# EAGLE board rs-485-multiplier-v2 (EAGLE 6.4)
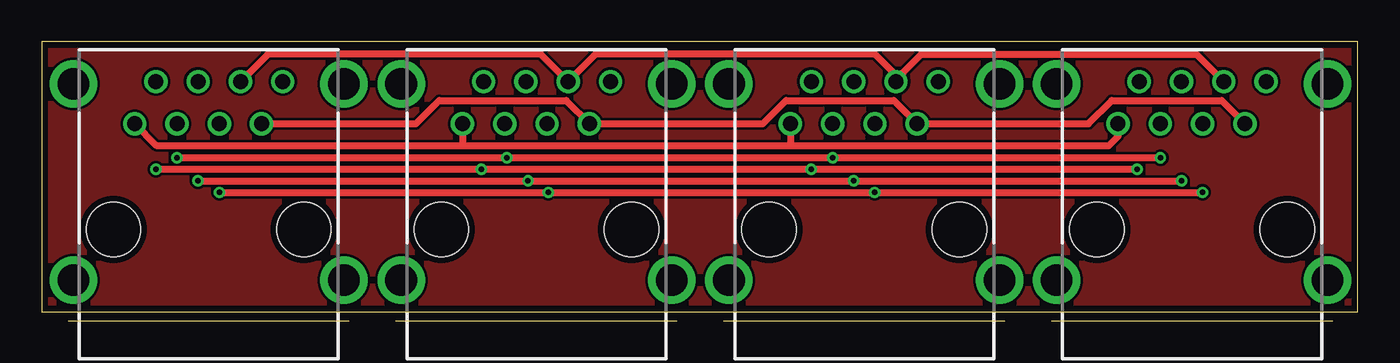
[diagram p0: board, top side]
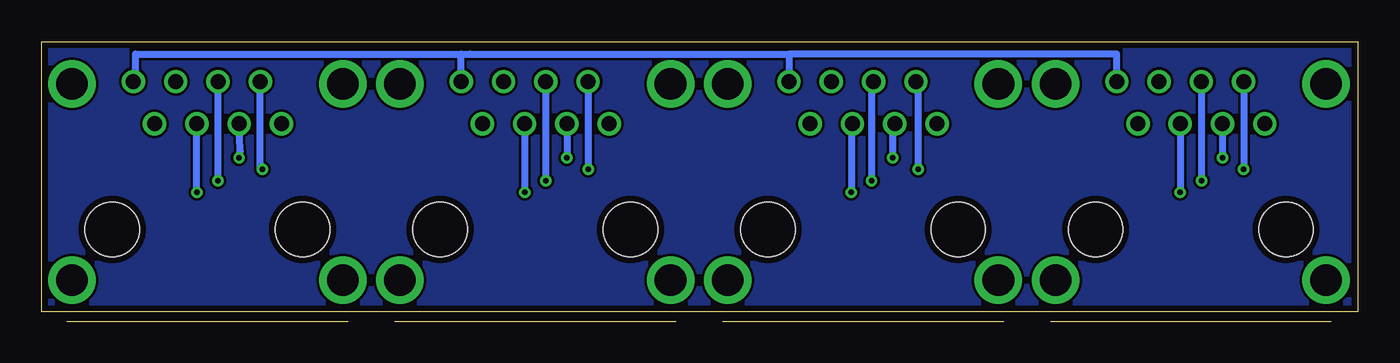
[diagram p1: board, bottom side, seen from below]

Size 79.05 x 16.25 mm. Coordinates in mm from the lower left corner, seen from the top.
Outline: 0,0 79.05,0 79.05,16.25 0,16.25 0,0
Copper layers (1*16): Top 0.0356mm / dielectric 1.5011mm / Bottom 0.0356mm
Design rules "LaenPCBOrder": minimum track width 6mil, minimum drill 13mil, track to track 6mil, track to pad 6mil, pad to pad 6mil, via to via 6mil, smd to smd 6mil, copper to edge 15mil, drill to drill 6mil, minimum pad ring 7mil, minimum via ring 7mil, stop-mask expansion 4mil, vias tented up to drill 0mil, thermal gap 10mil

## Footprints (pad centres in the part's own frame; a part is rotated, then mirrored left to right if it is on the bottom)
RJ45-SHIELD1 = drill 0.9 pad 1.4: 1 -4.445,6.35; 2 -3.175,8.89; 3 -1.905,6.35; 4 -0.635,8.89; 5 0.635,6.35; 6 1.905,8.89; 7 3.175,6.35; 8 4.445,8.89 | drill 1.9 pad 2.5: S1 -8.128,-3.048; S2 8.128,-3.048; S3 -8.128,8.76; S4 8.128,8.76 | hole 3.251: -5.715,0; 5.715,0

## Placement (x,y rotation side)
X1  RJ45-6L21-B  [RJ45-SHIELD1]  69.09,4.95 0 top
X2  RJ45-6L21-B  [RJ45-SHIELD1]  49.4,4.95 0 top
X3  RJ45-6L21-B  [RJ45-SHIELD1]  29.72,4.95 0 top
X4  RJ45-6L21-B  [RJ45-SHIELD1]  10.03,4.95 0 top

## Library data of the parts
X1-X4 = con-tycoelectronics; OC_FARNELL: unknown; OC_NEWARK: unknown

## Nets
N$1: X1.1 X2.1 X3.1 X4.1
N$2: X1.2 X2.2 X3.2 X4.2
N$3: X1.3 X2.3 X3.3 X4.3
N$4: X1.4 X2.4 X3.4 X4.4
N$5: X1.5 X2.5 X3.5 X4.5
N$6: X1.6 X2.6 X3.6 X4.6
N$7: X1.7 X2.7 X3.7 X4.7
N$8: X1.8 X2.8 X3.8 X4.8

## Tracks (layer width: path | path; a pad name or v marks a point on that pad's centre or on a via)
GND
  pour Top: 0,16.26 0,0 78.99,0 78.99,16.26
  pour Bottom: 0,16.26 0,0 79.25,0 79.5,0 79.5,16.26
N$1
  Top 0.406: X1.1 64.64,10.54 64.07,9.97 44.96,9.97 | 44.96,9.97 25.15,9.97 | 25.15,9.97 6.92,9.97 X4.1 | X2.1 44.96,9.97 | X3.1 25.27,10.1 25.15,9.97
N$2  (via drill 0.33)
  Top 0.406: v6.86,8.57 v26.42,8.57 v46.23,8.57 v65.79,8.57
  Bottom 0.406: X4.2 v6.86,8.57 | v65.79,8.57 65.91,8.57 X1.2 | X3.2 26.42,13.84 v26.42,8.57 | X2.2 v46.23,8.57
N$3  (via drill 0.33)
  Top 0.406: v8.13,9.27 v27.94,9.27 v47.5,9.27 v67.18,9.27
  Bottom 0.406: X4.3 v8.13,9.27 | v67.18,9.27 67.12,9.65 X1.3 | X3.3 27.94,11.3 v27.94,9.27 | X2.3 v47.5,9.27
N$4  (via drill 0.33)
  Top 0.406: v9.4,7.87 v29.21,7.87 v48.77,7.87 v68.45,7.87
  Bottom 0.406: X4.4 v9.4,7.87 | v68.45,7.87 X1.4 | X3.4 29.21,13.84 v29.21,7.87 | X2.4 v48.77,7.87
N$5  (via drill 0.33)
  Top 0.406: v10.67,7.18 v30.42,7.18 v50.04,7.18 v69.72,7.18
  Bottom 0.406: X4.5 v10.67,7.18 | v69.72,7.18 X1.5 | X3.5 30.42,11.3 v30.42,7.18 | X2.5 v50.04,7.18
N$6
  Top 0.406: X1.6 69.34,15.49 52.83,15.49 51.31,13.97 X2.6 51.31,14.22 50.04,15.49 33.27,15.49 X3.6 29.97,15.49 13.59,15.49 X4.6
N$7
  Top 0.406: X1.7 70.87,12.7 64.26,12.7 62.87,11.3 X2.7 51.18,12.7 44.7,12.7 43.31,11.3 X3.7 31.5,12.7 23.88,12.7 22.48,11.3 X4.7
N$8
  Bottom 0.406: X4.8 14.48,15.49 34.16,15.49 | 34.16,15.49 X3.8 | X2.8 53.85,15.49 | 53.85,15.49 53.34,15.49 34.16,15.49 | X1.8 73.41,13.84 73.41,15.49 53.85,15.49